# Altium PCB FuelCellMonitor.PcbDoc (part 2 of 2)
Units mil, origin at the board's own origin, x right, y up, seen from the top; angles counter-clockwise.
Board outline 6000 x 4000 mil, 2 copper layers (Top Layer, Bottom Layer); 108 components, 58 nets, 336 pads, 87 vias.
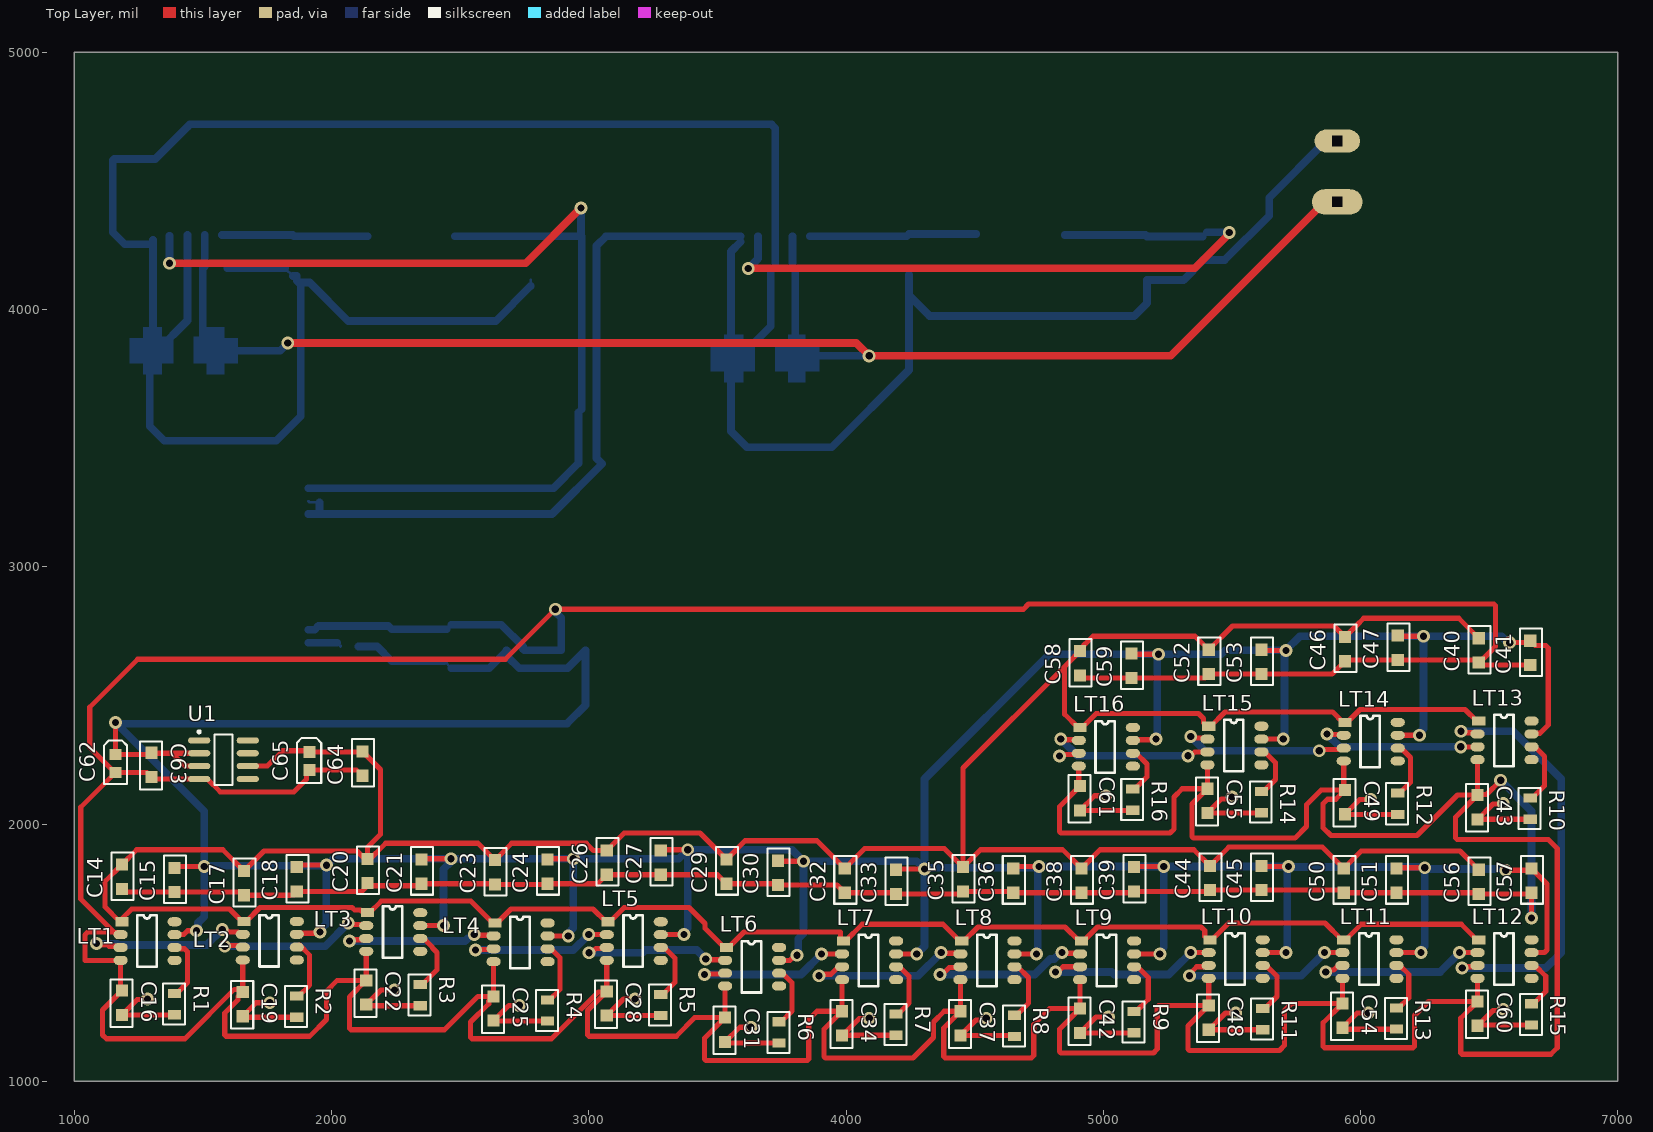
[diagram p0: Top Layer view]

## Via types
v1: diameter 50, hole 28, Top Layer to Bottom Layer, 87 vias

## Nets (pads, with @x,y where several pads share a name; then routed paths per layer and width w, separated by ;. In a path a pad name is that pad's centre, name@x,y a point inside that pad or via, vN(x,y) a via of type N, cw(c..) or ccw(c..) an arc to the next point about the centre after c; other vN are vias at no path point) (continued)
NetLT12_6: (continued)
  Top Layer w10: R15.1 R15.1@6672.87,1301.34 ; LT12.6 LT12.6@6675.06,1450
  Top Layer w20: R15.1@6672.87,1301.34 6720,1348.46 6720,1408.09 6678.09,1450 LT12.6@6675.06,1450
NetLT13_6: LT13.6 R10.1 | length 254.4
  Top Layer w10: R10.1 R10.1@6667.87,2101.34 ; LT13.6 LT13.6@6675.06,2300
  Top Layer w20: R10.1@6667.87,2101.34 6715,2148.46 6715,2263.09 6678.09,2300 LT13.6@6675.06,2300
NetLT14_6: LT14.6 R12.1 | length 228.7
  Top Layer w10: R12.1 R12.1@6152.87,2120 ; LT14.6 LT14.6@6155.06,2295
  Top Layer w20: R12.1@6152.87,2120 6195,2162.13 6195,2258.09 6158.09,2295 LT14.6@6155.06,2295
NetLT15_6: LT15.6 R14.1 | length 211.5
  Top Layer w10: R14.1 R14.1@5622.87,2126.34 ; LT15.6 LT15.6@5625.06,2280
  Top Layer w20: R14.1@5622.87,2126.34 5670,2173.46 5670,2238.09 5628.09,2280 LT15.6@5625.06,2280
NetLT16_6: LT16.6 R16.1 | length 196.5
  Top Layer w10: R16.1 R16.1@5122.87,2136.34 ; LT16.6 LT16.6@5125.06,2275
  Top Layer w20: R16.1@5122.87,2136.34 5170,2183.46 5170,2233.09 5128.09,2275 LT16.6@5125.06,2275
pads on no net: "Isolated DC/DC1.6" "Isolated DC/DC1.7" "Isolated DC/DC1.8" "Isolated DC/DC1.9" "Isolated DC/DC1.10" "Isolated DC/DC1.11" "Isolated DC/DC1.12" LT1.5 LT1.8 LT2.5 LT2.8 LT3.5 LT3.8 LT4.5 LT4.8 LT5.5 LT5.8 LT6.5 LT6.8 LT7.5 LT7.8 LT8.5 LT8.8 LT9.5 LT9.8 LT10.5 LT10.8 LT11.5 LT11.8 LT12.5 LT12.8 LT13.5 LT13.8 LT14.5 LT14.8 LT15.5 LT15.8 LT16.5 LT16.8 U1.1 U1.5 U1.7 U1.8

## Text inside footprints (layer, text, board x,y; h text height)
"Isolated DC/DC1": Bottom Overlay "DCP020505U" at 2025,3375 h60